# Altium PCB USB-UART.PcbDoc
Units mm, origin at the board's own origin, x right, y up, seen from the top; angles counter-clockwise.
Board outline 32.77 x 12.06 mm, 2 copper layers (Top Layer, Bottom Layer), stack 1.1 mm thick; 15 components, 17 nets, 69 pads, 24 vias.
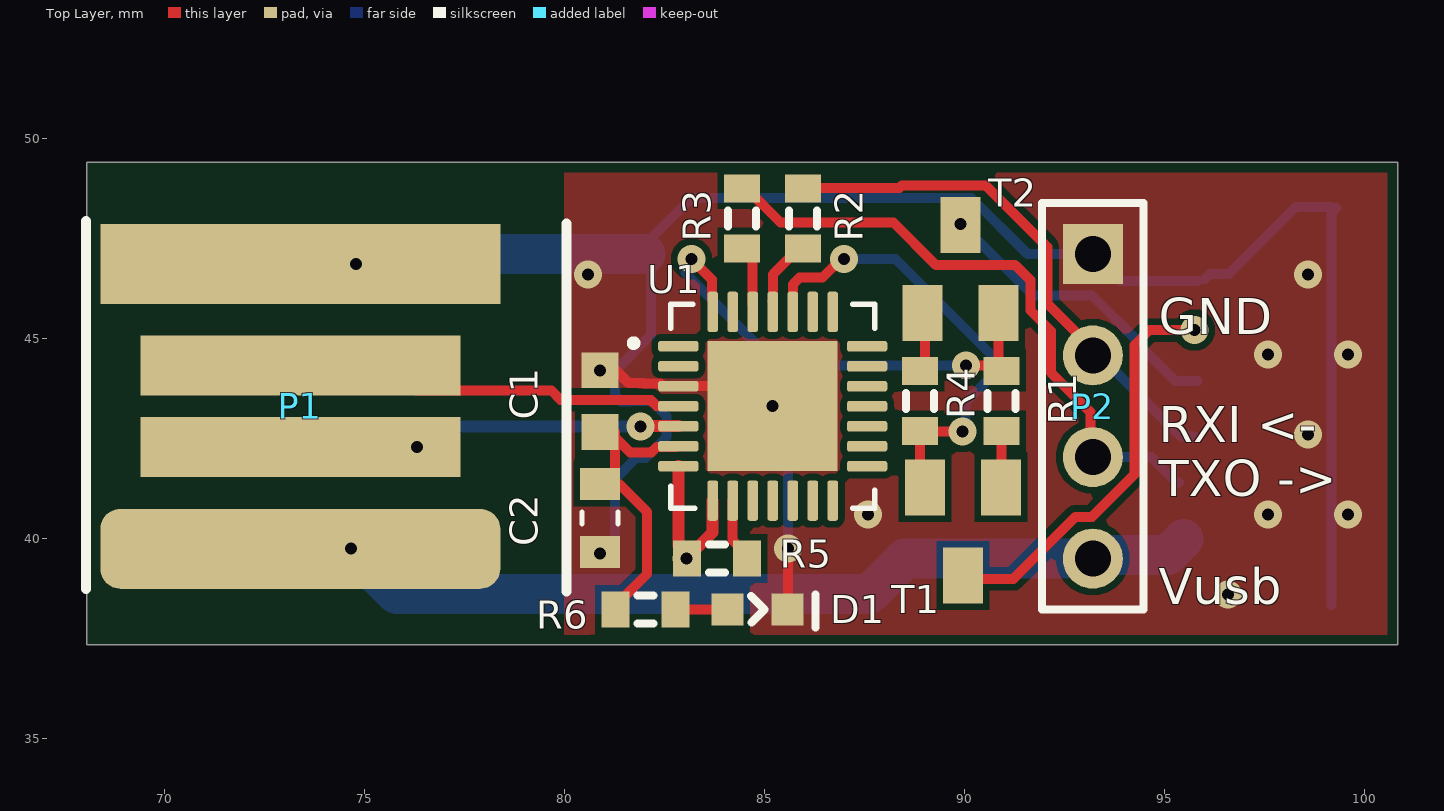
[diagram p0: Top Layer view]
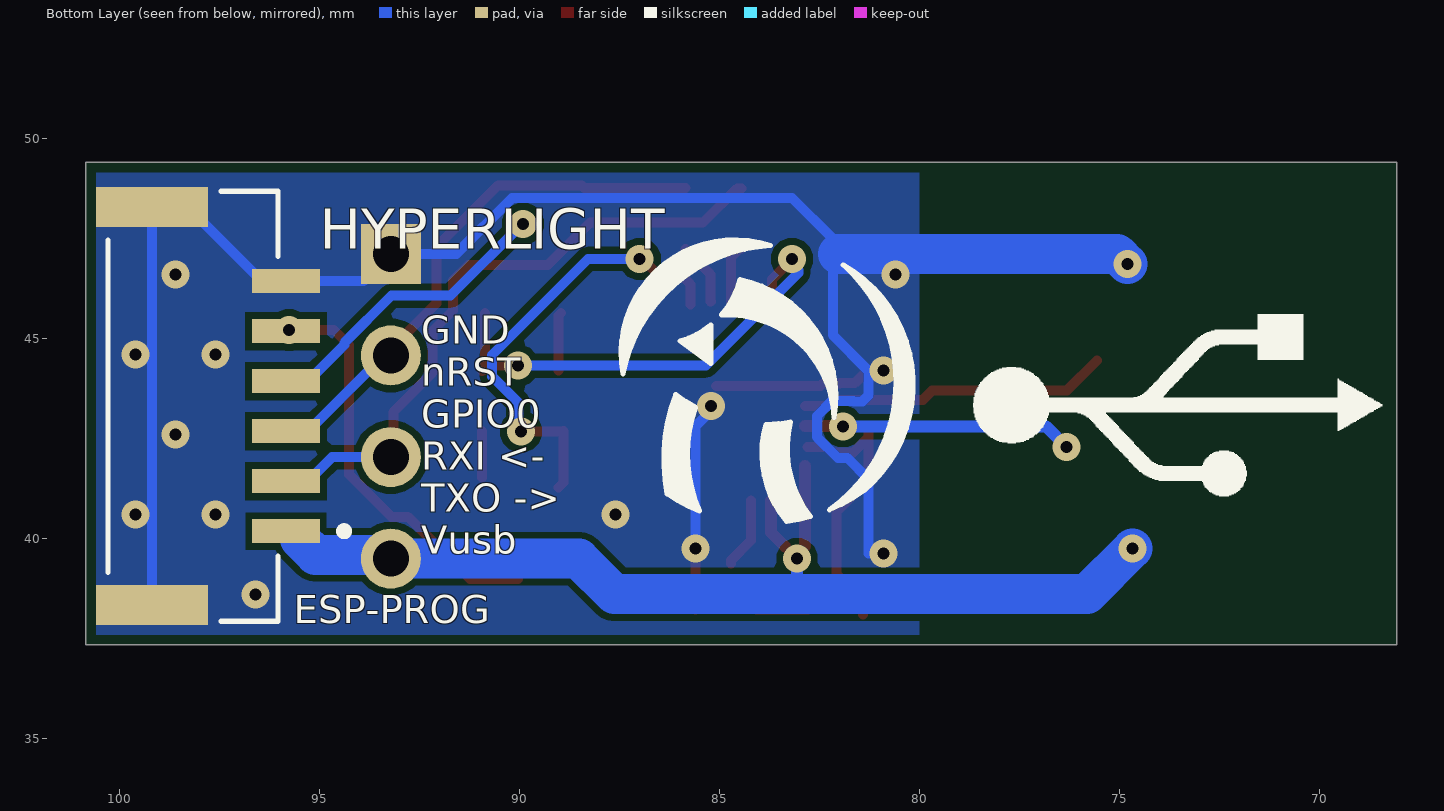
[diagram p1: Bottom Layer view, seen from below]

## Layer stack, top to bottom
Top Solder: solder mask 0.0102, Solder Resist, Dk 3.5
Top Layer: signal copper 0.05
Dielectric 1: dielectric 1, FR-4, Dk 4.8
Bottom Layer: signal copper 0.05
Bottom Solder: solder mask 0.0102, Solder Resist, Dk 3.5

## Board outline
68.072,37.338 100.838,37.338 100.838,49.403 68.072,49.403

## Design rules (kind name [scope] priority, off if disabled: settings)
BoardOutlineClearance [All] p1: gap=0.25 ignorepadtopadclearanceinfootprint=FALSE
Clearance [All] p1: gap=0.17 ignorepadtopadclearanceinfootprint=FALSE
ComponentClearance [All] p1: gap=0.254 collisioncheckmode=3 verticalgap=2540 showdistances=FALSE
FanoutControl Fanout_SOIC [IsSOIC] p3: bgadir=Out bgaviamode=Closest fanoutstyle=Auto fanoutdirection=Alternating viagrid=0.025 // Fanout_SOIC (Default Rule)
FanoutControl Fanout_Small [(CompPinCount < 5)] p4: bgadir=Out bgaviamode=Closest fanoutstyle=Auto fanoutdirection=OutThenIn viagrid=0.025 // Fanout_Small (Default Rule)
FanoutControl Fanout_Default [All] p5: bgadir=In bgaviamode=Closest fanoutstyle=Auto fanoutdirection=Alternating viagrid=0.025 // Fanout_Default (Default Rule)
HoleSize [All] p1: absolutevalues=TRUE maxlimit=4.5 minlimit=0.3 maxpercent=80.000 minpercent=20.000
HoleToHoleClearance [All] p1: gap=0.4 allowstackedmicrovias=TRUE
MinimumSolderMaskSliver [All] p1: minsoldermaskwidth=0.15
PlaneClearance [All] p1: clearance=0.2
PlaneConnect [All] p1: planeconnectstyle=Relief reliefexpansion=0.5 reliefentries=4 reliefconductorwidth=0.2 reliefairgap=0.25
PolygonConnect PolygonConnect_1 [InNet('GND')] p1: connectstyle=Direct reliefconductorwidth=0.254 reliefentries=4 polygonreliefangle="90 Angle" airgapwidth=0.254
PolygonConnect [All] p2: connectstyle=Relief reliefconductorwidth=0.3 reliefentries=4 polygonreliefangle="90 Angle" airgapwidth=0.16
RoutingCorners [All] p1: cornerstyle=45-Degree minsetback=2.5 maxsetback=2.5
RoutingPriority [All] p1 off: routingpriority=0
RoutingVias [All] p1: holewidth=0.3 width=0.7 viastyle="Through Hole" minholewidth=0.3 minwidth=0.7 maxholewidth=0.8 maxwidth=1.2
SilkToSilkClearance [All] p1: silktosilkclearance=0
SilkToSolderMaskClearance [IsPad] p1: minsilkscreentomaskgap=0 clearancetoexposedcopper=TRUE
SolderMaskExpansion [All] p1: expansion=0.1 istentingtop=FALSE
Width [All] p1: maxlimit=5 minlimit=0.17 preferedwidth=0.3
17 further rules are at their usual default settings.

## Components (designator, comment, footprint, x,y, rotation, side; value= is the part's Value field where it differs from the comment)
C1 "GRM188R71C105KA12D" CAPC1608X90N 80.899,43.434 r270 top value=1u
C2 "GX035C104MAT2-500" *CAPC1608X90 80.899,40.513 r270 top value=0.1u
D1 "0603-LED-BLUE" *LEDM1608X80_LTE-C1906R-14(Primary) 84.836,38.227 r180 top
ESP-PROG "BM06B-GHS-TBT(LF)(SN)(N)" *JST_BM06B-GHS-TBT(LF)(SN)(N)_BM06B-GHS-TBT(LF)(SN)(N)(Primary) 99.187,43.307 r270 bottom
P1 "USB type A" "USB type A" 73.408,39.743 r90 top
P2 "Side Header 4" HDR1X4 93.218,47.117 r270 top
R1 "RC0603FR-0710KL" J1-0603 90.932,43.434 r90 top value=10k
R2 "RC0603FR-07330RL" J1-0603 85.979,48.006 r270 top value=330
R3 "RC0603FR-07330RL" J1-0603 84.455,48.006 r270 top value=330
R4 "RC0603FR-0710KL" J1-0603 88.9,43.434 r270 top value=10k
R5 "RC0603FR-074K7L" J1-0603 83.82,39.497 r0 top value=4.7k
R6 "RC0603FR-071KL" J1-0603 82.042,38.227 r0 top value=1k
T1 "BC847" SOT23 89.977,40.175 r180 top
T2 "BC847" SOT23 89.916,46.736 r0 top
U1 "CP2102N-A01-GQFN28" QFN50P500X500X80-29N 85.217,43.307 r0 top

## Footprints (in the part's own frame and the unit in brackets; to place one, negate y for a bottom-side part, rotate by r counter-clockwise, add the part's x,y. Pads: shape width x height; smd on the part's side, far side on the other; paste and mask are expansions set on the pad)
*CAPC1608X90 [mm]
  rect 0.8x1 smd: 1(-0.85,0) 2(0.85,0)
  silkscreen extent -0.15,-0.45 0.15,0.45, body extent -0.8,-0.4 0.8,0.41, height 0.88
*JST_BM06B-GHS-TBT(LF)(SN)(N)_BM06B-GHS-TBT(LF)(SN)(N)(Primary) [mm]
  rect 0.6x1.7 smd: 1(3.125,3.35) 2(1.875,3.35) 3(0.625,3.35) 4(-0.625,3.35) 5(-1.875,3.35) 6(-3.125,3.35)
  rect 1x2.8 smd: S1(-4.975,0) S2(4.975,0)
  silkscreen extent -5.38,-1.1 5.38,4.9, body extent -5.37,-1.1 5.38,3.85, height 3.88
*LEDM1608X80_LTE-C1906R-14(Primary) [mm]
  rect 0.8x0.8 smd: A(0.75,0) C(-0.75,0)
  silkscreen extent -1.45,-0.38 0.16,0.45, body extent -0.8,-0.3 0.8,0.3, height 1.15
CAPC1608X90N [mm]
  rect 0.89x0.93 smd: 1(-0.77,0) 2(0.77,0)
  body extent -0.8,-0.4 0.8,0.4, height 0.9
HDR1X4 [mm] "Connector; Header; 4 Position"
  rect 1.5x1.5 hole 0.9: 1(0,0)
  round 1.5 hole 0.9: 2(2.54,0) 3(5.08,0) 4(7.62,0)
  silkscreen extent -1.27,-1.27 8.89,1.27
J1-0603 [mm] "Chip Resistor, Body 1.6x0.8mm, IPC High Density"
  rect 0.7x0.9 smd: 1(-0.75,0) 2(0.75,0)
  silkscreen extent -0.2,-0.35 0.2,0.35, body extent -0.85,-0.48 0.85,0.48, height 0.9
QFN50P500X500X80-29N [mm]
  rrect50% 1.01x0.27 smd: 1(-2.36,1.5) 2(-2.36,1) 3(-2.36,0.5) 4(-2.36,0) 5(-2.36,-0.5) 6(-2.36,-1) 7(-2.36,-1.5) 15(2.36,-1.5) 16(2.36,-1) 17(2.36,-0.5) 18(2.36,0) 19(2.36,0.5) 20(2.36,1) 21(2.36,1.5)
  rrect50% 0.27x1.01 smd: 8(-1.5,-2.36) 9(-1,-2.36) 10(-0.5,-2.36) 11(0,-2.36) 12(0.5,-2.36) 13(1,-2.36) 14(1.5,-2.36) 22(1.5,2.36) 23(1,2.36) 24(0.5,2.36) 25(0,2.36) 26(-0.5,2.36) 27(-1,2.36) 28(-1.5,2.36)
  rect 3.25x3.25 smd paste-3: 29(0,0)
  silkscreen extent -3.55,-2.55 2.55,2.55, body extent -2.5,-2.5 2.5,2.5, height 0.77
SOT23 [mm]
  rect 1x1.4 smd: 1(-0.95,-1.1) 2(0.95,-1.1) 3(0,1.1)
  body extent -1.43,-1.25 1.49,1.15, height 1.15
"USB type A" [mm]
  rrect50% 2x10 smd: 1(0,0)
  rect 1.5x8 smd: 2(2.54,0.002) 3(4.58,0.002)
  rect 2x10 smd: 4(7.12,0)
  silkscreen extent -1.07,-6.65 8.19,5.36

## Part data
C1: "SMD Capacitor X7R(EIA) with Capacitance: 1.0uF Tol. 10%. Rated Voltage: 16Vdc", Package=0603, ChipDip_Link=https://www.chipdip.ru/product/grm188r71c105ka12d, ChipDip_Price=15, HelpURL=https://static.chipdip.ru/lib/428/DOC005428493.pdf, MF="Murata Electronics", MP=GRM188R71C105KA12D, Pacage Metric=1608, Price=0.048, SnapEDA_Link=https://www.snapeda.com/parts/GRM188R71C105KA12D/Murata%20Electronics%20North%20America/view-part/228340/?ref=snap, Type=SMD
C2: "Cap Thin Film 0.1uf 50v 0603", Package="0603 AVX", ChipDip_Link=https://www.chipdip.ru/product0/9000410929, ChipDip_Price=10, MF=AVX, MP=GX035C104MAT2-500, Pacage Metric=1608, Price=0.024, SnapEDA_Link=https://www.snapeda.com/parts/GX035C104MAT2-500/AVX/view-part/?ref=snap, Type=SMD
D1: library part LTE-C1906R-14, "LED IrLED Chip LED 2-Pin SMD T/R", Package="0603 Lite-On", MP=0603-LED-BLUE, SnapEDA_Link=https://www.snapeda.com/parts/LTE-C1906R-14/Lite-On%20Inc./view-part/?ref=snap, Type=SMD
ESP-PROG: "Conn Header Gh Top 6pos 1.25mm", Package=None, Instructions=DNP, MF="JST Sales", MP=BM06B-GHS-TBT_LF__SN__N_, Price=None, SnapEDA_Link=https://www.snapeda.com/parts/BM06B-GHS-TBT%28LF%29%28SN%29%28N%29/JST%20Sales%20America%20Inc./view-part/?ref=snap
P1: "USB - micro A", Instructions=DNP
P2: "Header, 4-Pin", MP="PLS-4R (DS1022-1x4R)"
R1 R4: "10 kOhms 1 0.1 W 1 10 W Chip Resistor 0603 1608 Metric Thick Film", Package=R0603, ChipDip_Link=https://www.chipdip.ru/product0/9000079736, HelpURL=https://www.yageo.com/upload/media/product/productsearch/datasheet/rchip/PYu-RC_Group_51_RoHS_L_10.pdf, MF="Yageo or NXP", MP=RC0603FR-0710KL, Pacage Metric=1608, Price=0.002, SnapEDA_Link=https://www.snapeda.com/parts/RC0603FR-0710KL/Yageo/view-part/?ref=dk&t=RC0603FR-0710KL&con_ref=None, Type=SMD
R2 R3: "330 Ohms ±1% 0.1W, 1/10W Chip Resistor 0603 (1608 Metric) Thick Film", Package=R0603, ChipDip_Link=https://www.chipdip.ru/product0/9000079628, HelpURL=https://www.yageo.com/upload/media/product/productsearch/datasheet/rchip/PYu-RC_Group_51_RoHS_L_10.pdf, MF="Yageo or NXP", MP=RC0603FR-07330RL, Pacage Metric=1608, SnapEDA_Link=https://www.snapeda.com/parts/RC0603FR-07330RL/Yageo/view-part/?ref=search&t=RC0603FR-07330RL, Type=SMD
R5: "4.7 kOhms ±1% 0.1W, 1/10W Chip Resistor 0603 (1608 Metric) Thick Film", Package=R0603, ChipDip_Link=https://www.chipdip.ru/product0/9000079736, HelpURL=https://www.yageo.com/upload/media/product/productsearch/datasheet/rchip/PYu-RC_Group_51_RoHS_L_10.pdf, MF="Yageo or NXP", MP=RC0603FR-074K7L, Pacage Metric=1608, Price=0.006, SnapEDA_Link=https://www.snapeda.com/parts/RC0603FR-074K7L/Yageo/view-part/?ref=dk&t=RC0603FR-074K7L&con_ref=None, Type=SMD
R6: "1 kOhms ±1% 0.1W, 1/10W Chip Resistor 0603 (1608 Metric) Moisture Resistant Thick Film", Package=R0603, HelpURL=https://www.yageo.com/upload/media/product/productsearch/datasheet/rchip/PYu-RC_Group_51_RoHS_L_10.pdf, MF="Yageo or NXP", MP=RC0603FR-071KL, Pacage Metric=1608, Price=0.036, SnapEDA_Link=https://www.snapeda.com/parts/RC0603FR-101KL/Yageo/view-part/?ref=search&t=RC0603FR-07%201k, Type=SMD
T1 T2: "<b>NPN TRANSISTOR</b>", Package=None, MF="{'manufacturer': u'Rectron'}", MP=BC847, Price=None
U1: "Ic Bridge Usb To Uart 28qfn", Package=None, MF="{'manufacturer': u'Silicon Labs'}", MP=CP2102N-A01-GQFN28, Price=None

## Via types
v1: diameter 0.7, hole 0.3, Top Layer to Bottom Layer, tented both sides, 24 vias

## Nets (pads, with @x,y where several pads share a name; then routed paths per layer and width w, separated by ;. In a path a pad name is that pad's centre, name@x,y a point inside that pad or via, vN(x,y) a via of type N, cw(c..) or ccw(c..) an arc to the next point about the centre after c; other vN are vias at no path point)
3.3: C1.2 C2.1 R6.1 U1.6 | length 7
  Top Layer w0.25: C1.2@81.27,42.664 81.27,42.532 81.648,42.154 82.182,42.154 82.319,42.291 U1.6@82.804,42.291 ; C1.2@81.28,42.522 81.28,41.363 81.38,41.363 82.075,40.668 82.075,39.11 81.407,38.442 R6.1@81.407,38.1
D+: P1.3 U1.4 | length 7.8
  Top Layer w0.25: P1.3@75.565,44.45 76.317,43.698 79.683,43.698 79.917,43.464 81.807,43.464 81.814,43.457 82.169,43.457 82.309,43.317 82.847,43.317 U1.4
D-: P1.2 U1.5 | length 6.7
  Top Layer w0.3: v1(81.915,42.799) 81.923,42.807 U1.5
  Bottom Layer w0.3: v1(76.327,42.291) 76.835,42.799 v1(81.915,42.799)
GND: C1.1 C2.2 D1.C ESP-PROG.6 ESP-PROG.S1 ESP-PROG.S2 P1.4 P2.1 U1.3 U1.29 | length 55.7
  Top Layer w0.25: v1(80.899,44.196) C1.1@80.927,44.196 ; C1.1@81.308,44.196 81.62,43.884 81.981,43.884 81.988,43.877 82.417,43.877 82.477,43.817 82.847,43.817 U1.3 U1.29@85.082,43.807 ; D1.C@85.598,38.227 v1(85.598,39.751)
  Bottom Layer w0.25: v1(80.899,44.196) 81.28,44.196 ; 81.28,39.628 81.28,41.488 81.802,42.01 82.038,42.01 82.56,42.532 82.56,43.066 82.182,43.444 81.648,43.444 81.634,43.43 81.426,43.43 81.28,43.576 81.28,44.196 ; v1(85.217,43.307) 85.217,43.185 85.598,42.804 v1(85.598,39.751) ; ESP-PROG.6 93.903,46.432 P2.1 91.58,47.117 90.183,48.514 83.185,48.514 82.169,47.498 82.169,45.085 81.28,44.196 ; ESP-PROG.6@96.012,46.482 96.137,46.607 96.612,46.607 98.287,48.282 ESP-PROG.S1 ; ESP-PROG.S2 99.187,48.133 ESP-PROG.S1@99.314,48.26
  Bottom Layer w1: v1(74.803,46.863) 75.057,47.117 82.042,47.117
  other v1: 96.6,38.6 80.899,39.628 87.6,40.6 97.6,40.6 99.6,40.6 98.6,42.6 97.6,44.6 99.6,44.6 80.6,46.6 98.6,46.6
GPIO0: ESP-PROG.4 T2.3 | length 7.6
  Bottom Layer w0.25: v1(89.916,47.869) 89.926,47.869 91.723,46.072 93.201,46.072 94.381,44.891 94.381,44.838 95.287,43.932 ESP-PROG.4
nDTR: R1.2 T2.2 U1.28 | length 11.9
  Top Layer w0.25: v1(83.185,46.99) 83.185,46.981 83.693,46.473 U1.28@83.693,45.974 ; v1(90.043,44.323) 90.793,44.323 R1.2 ; R1.2@90.805,44.323 90.866,44.384 T2.2
  Bottom Layer w0.25: v1(83.185,46.99) 83.185,46.868 83.031,46.714 83.031,46.636 85.344,44.323 v1(90.043,44.323)
NetD1_A: D1.A R6.2 | length 1.3
  Top Layer w0.25: R6.2 D1.A@84.074,38.227
NetR1_1: R1.1 T1.1 | length 1.2
  Top Layer w0.25: T1.1@90.932,41.529 R1.1
NetR2_2: R2.2 U1.25 | length 1.6
  Top Layer w0.25: U1.25@85.217,45.921 85.227,45.931 85.227,46.604 85.852,47.229 R2.2@85.852,47.244
NetR3_2: R3.2 U1.26 | length 1.5
  Top Layer w0.25: R3.2 84.492,47.256 84.717,47.031 84.717,45.921 84.717,45.855 U1.26@84.709,45.847
NetR4_1: R4.1 T2.1 | length 1.5
  Top Layer w0.25: T2.1 89.027,45.575 R4.1@89.027,44.196
NetR5_2: R5.2 U1.9 | length 1.8
  Top Layer w0.25: U1.9 84.217,39.95 84.709,39.458 R5.2@84.709,39.37
NRST: ESP-PROG.5 T1.3 | length 10.3
  Top Layer w0.25: T1.3@90.043,38.989 91.232,38.989 92.785,40.542 93.201,40.542 94.263,41.604 94.263,44.841 94.634,45.212 v1(95.758,45.212)
  Bottom Layer w0.25: v1(95.758,45.212) 95.788,45.182 ESP-PROG.5
nRTS: R4.2 T1.2 U1.24 | length 11.5
  Top Layer w0.25: U1.24@85.725,45.847 85.725,46.355 85.892,46.522 86.462,46.522 86.93,46.99 v1(86.995,46.99) ; T1.2 88.9,41.402 R4.2 88.906,42.678 89.956,42.678 v1(89.962,42.672)
  Bottom Layer w0.25: v1(86.995,46.99) 88.288,46.99 90.688,44.59 90.688,44.055 90.03,43.397 90.03,42.74 v1(89.962,42.672)
RXD: ESP-PROG.3 P2.2 R2.1 | length 13.5
  Top Layer w0.25: R2.1@85.852,48.768 88.39,48.768 88.453,48.831 90.538,48.831 92.081,47.288 92.081,45.874 93.218,44.737 P2.2
  Bottom Layer w0.25: P2.2 93.392,44.577 95.424,42.545 ESP-PROG.3@95.758,42.545
TXO: ESP-PROG.2 P2.3 R3.1 | length 15.7
  Top Layer w0.25: R3.1 84.555,48.756 85.41,47.901 88.234,47.901 89.294,46.841 91.278,46.841 91.661,46.458 91.661,45.7 92.173,45.188 92.173,44.144 93.155,43.162 93.155,42.227 P2.3@93.345,42.037
  Bottom Layer w0.25: P2.3 94.682,42.037 95.317,41.402 ESP-PROG.2@95.377,41.402
VBUS: ESP-PROG.1 P1.1 P2.4 R5.1 U1.7 U1.8 | length 26.3
  Top Layer w0.3: U1.7 82.857,39.81 83.058,39.609 v1(83.058,39.497) ; R5.1@83.358,39.797 83.717,40.156 U1.8
  Bottom Layer w0.3: 83.058,38.735 v1(83.058,39.497)
  Bottom Layer w1: v1(74.676,39.751) 75.819,38.608 87.626,38.608 88.515,39.497 P2.4 93.314,39.593 95.098,39.593 ESP-PROG.1@95.487,39.982
pads on no net: U1.1 U1.2 U1.10 U1.11 U1.12 U1.13 U1.14 U1.15 U1.16 U1.17 U1.18 U1.19 U1.20 U1.21 U1.22 U1.23 U1.27

## Polygon pours and split planes (outlines as drawn)
GND on Top Layer "NONET_L-01_P-001" (solid, remove dead copper, pour order 0): 80.01,50.673 80.01,35.814 102.997,35.814 102.997,50.673
GND on Bottom Layer "NONET_L-01_P-001" (solid, remove dead copper, pour order 1): 103.251,51.689 103.251,35.179 80.01,35.179 80.01,50.8

## Silkscreen, mask and mechanical layers (free items; w line width, h text height)
Top Overlay:
  text "GND /  / RXI <- / TXO -> /  / Vusb" at 94.869,38.354 h0.9
Bottom Overlay:
  drawing of 26 lines, arcs and shapes, not listed
  text "HYPERLIGHT" at 94.996,47.244 h1
  text "GND / nRST / GPIO0 / RXI <- / TXO -> / Vusb" at 92.456,39.624 h0.7
Bottom Solder:
  region: 83.927,40.384 ccw(c83.913,44.684) 84.555,40.432 ccw(c81.884,42.36) 85.103,43.058 cw(c83.895,46.466) 84.498,42.901 cw(c81.408,42.278)
  region: 87.064,42.09 ccw(c84.121,42.027) 86.523,43.729 cw(c87.48,41.619) 89.158,43.215 ccw(c89.082,40.847)
  region: 82.202,46.957 82.083,47.601 cw(c82.082,47.606) 82.076,47.606 cw(c82.587,47.648) 83.1,47.648 cw(c83.095,47.648) 83.1,47.648 cw(c82.587,47.648) 83.1,47.637 83.1,47.648 ccw(c82.587,47.648) 83.1,47.648 83.1,47.637 83.096,47.254 ccw(c83.091,47.254) 83.096,47.254 cw(c83.091,47.254) 83.093,47.249 82.209,46.953 cw(c82.208,46.958)
  lines w0.01: 82.08,47.648 82.208,46.958 83.091,47.254 83.095,47.648 ; 82.082,47.606 cw(c82.587,47.648) 83.093,47.597
  lines w0.127: 83.927,40.384 ccw(c83.913,44.684) 84.555,40.432 ccw(c81.884,42.36) 85.103,43.058 cw(c83.895,46.466) 84.498,42.901 cw(c81.408,42.278) 83.927,40.384 ; 86.523,43.729 cw(c84.121,42.027) 87.064,42.09 cw(c89.082,40.847) 89.158,43.215 ccw(c87.48,41.619) 86.523,43.729
Mechanical 2:
  the board outline again, w0.25